# Altium PCB LED Project PCB.PcbDoc
Units mm, origin at the board's own origin, x right, y up, seen from the top; angles counter-clockwise.
Board outline 20 x 20 mm, 2 copper layers (Top Layer, Bottom Layer), stack 1.671 mm thick; 5 components, 4 nets, 10 pads, 1 vias.
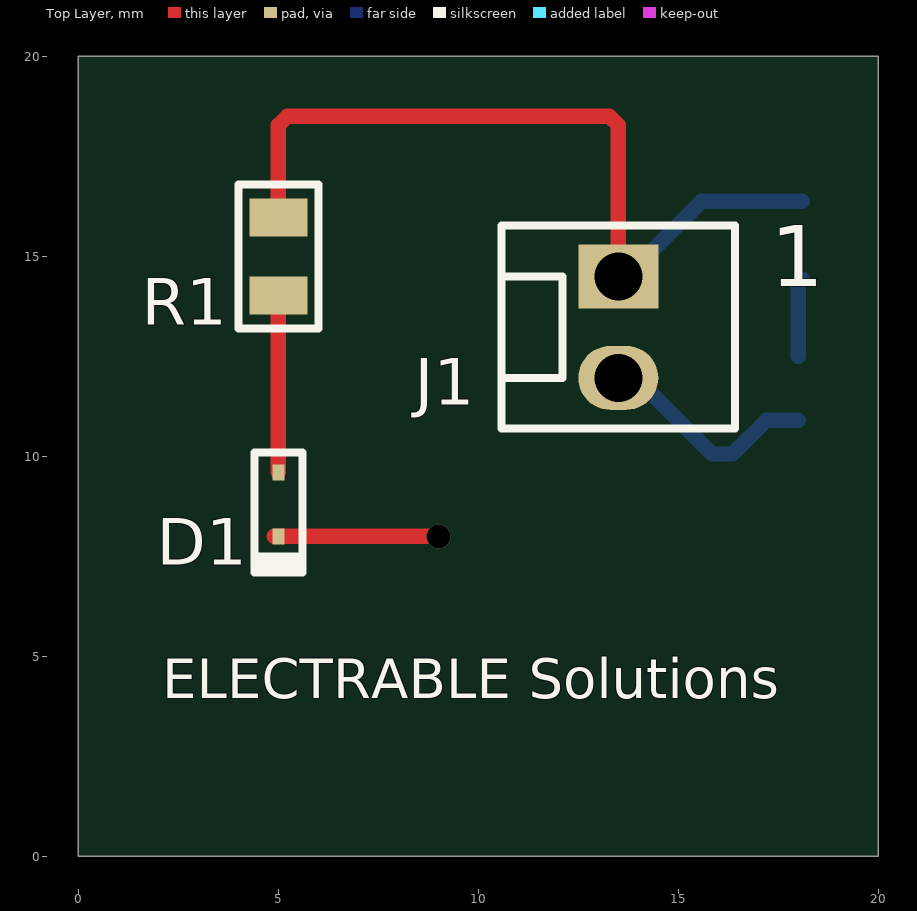
[diagram p0: Top Layer view]
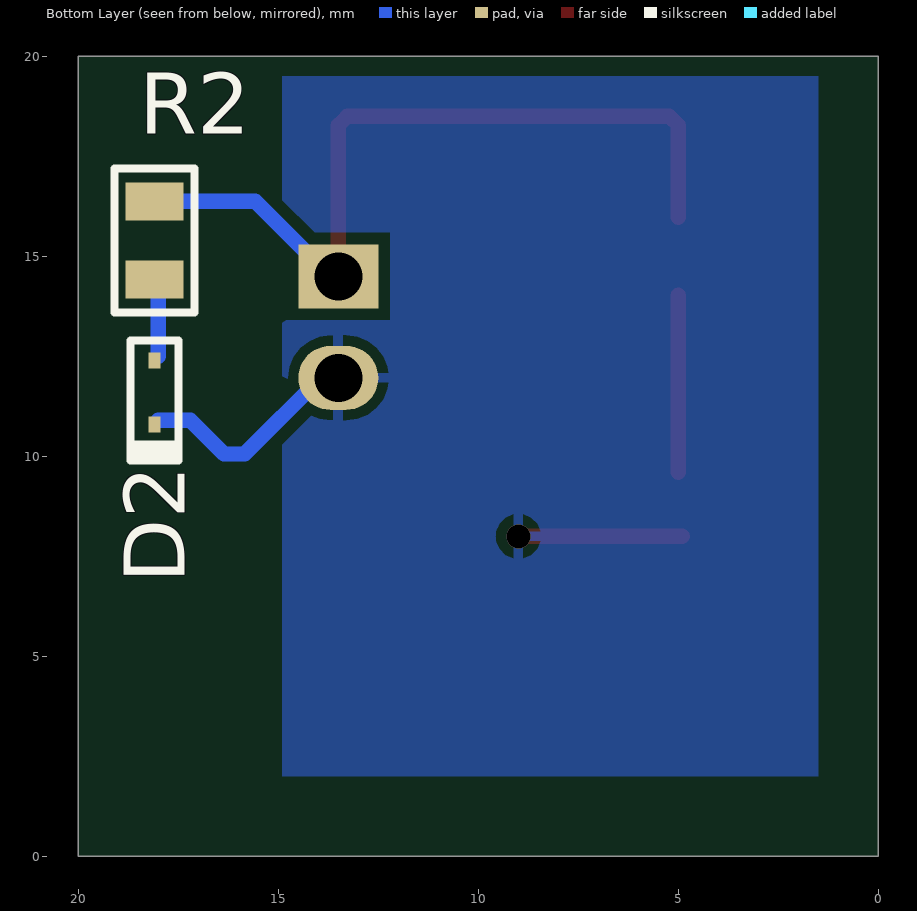
[diagram p1: Bottom Layer view, seen from below]
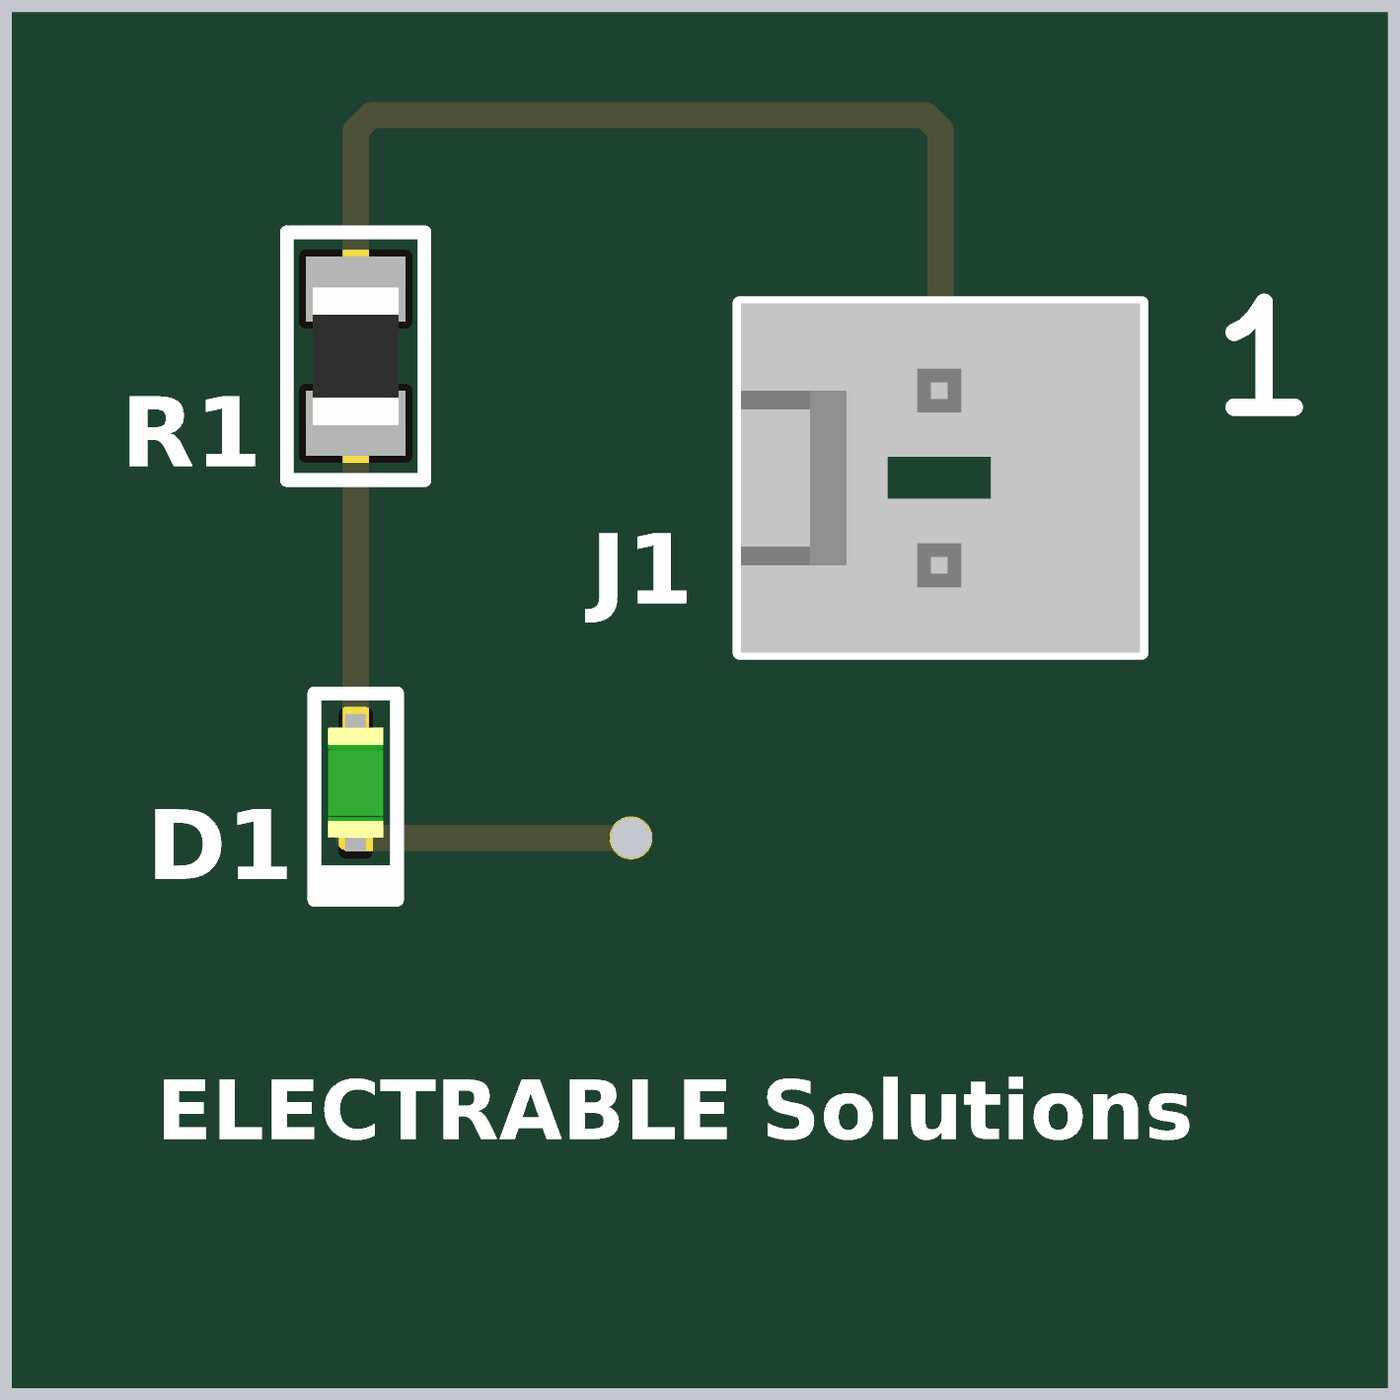
[diagram p2: 3D render of the assembled board from above, using the file's embedded part models]

## Layer stack, top to bottom
Top Solder: solder mask 0.0102, Solder Resist, Dk 3.5
Top Layer: signal copper 0.0356
Dielectric 1: dielectric 1.6, FR-4, Dk 4.8
Bottom Layer: signal copper 0.0356
Bottom Solder: solder mask 0.0102, Solder Resist, Dk 3.5

## Board outline
0,0 20,0 20,20 0,20

## Design rules (kind name [scope] priority, off if disabled: settings)
Clearance [All] p1: gap=0.3 ignorepadtopadclearanceinfootprint=FALSE
PolygonConnect [All] p1: connectstyle=Relief reliefconductorwidth=0.254 reliefentries=4 polygonreliefangle="90 Angle" airgapwidth=0.254
RoutingVias [All] p1: holewidth=0.3 width=0.6 viastyle="Through Hole" minholewidth=0.3 minwidth=0.6 maxholewidth=0.3 maxwidth=0.6
SilkToSolderMaskClearance [IsPad] p1: minsilkscreentomaskgap=0.1 clearancetoexposedcopper=TRUE
SolderMaskExpansion [All] p1: expansion=0.102 istentingtop=FALSE
Width [All] p1: maxlimit=1 minlimit=0.3 preferedwidth=0.5
29 further rules are at their usual default settings.

## Components (designator, comment, footprint, x,y, rotation, side; value= is the part's Value field where it differs from the comment)
D1 "Green" LED1540G 5,8.8 r90 top
D2 "Green" LED1540G 18.1,11.6 r90 bottom
J1 "1x2 Header" HDR1X2 13.5,14.5 r0 top
R1 "360R" R0805 5,15 r90 top
R2 "360R" R0805 18.1,15.4 r90 bottom

## Footprints (in the part's own frame and the unit in brackets; to place one, negate y for a bottom-side part, rotate by r counter-clockwise, add the part's x,y. Pads: shape width x height; smd on the part's side, far side on the other; paste and mask are expansions set on the pad)
HDR1X2 [mm]
  rect 2x1.6 hole 1.2: 1(0,0)
  oval 2x1.6 hole 1.2: 2(0,-2.54)
  silkscreen extent -2.92,-3.81 2.92,1.27, body extent -2.9,-3.81 2.9,1.27, height 11.71
LED1540G [mm]
  rect 0.4x0.3 smd: 1(-0.8,0) 2(0.8,0)
  silkscreen extent -1.7,-0.6 1.3,0.6, body extent -0.8,-0.4 0.8,0.4, height 0.4
R0805 [mm]
  rect 0.95x1.45 smd: 1(-0.975,0) 2(0.975,0)
  silkscreen extent -1.8,-1 1.8,1, body extent -1,-0.62 1,0.62, height 0.61

## Part data
D1 D2: library part LNJ115W8ARA, "Led Green/orange TSS-2 Type SMD", Case Code (Imperial)=0605, Case Code (Metric)=1613, Color=Green,Orange,Yellow, Forward Voltage=1.93V, Manufacturer=Panasonic, Max Operating Temperature=85°C, Min Operating Temperature=-30°C, Package Quantity=1, Supplier Part Number 1=P11142CT-ND, Test Current=10mA, Case/Package=0605, Category=LEDs, Category1=Optoelectronics, ComponentLink1Description=https://datasheet.ciiva.com/1246/340491-1246153.pdf?src-supplier=Element14, ComponentLink1URL=https://datasheet.ciiva.com/1246/340491-1246153.pdf?src-supplier=Element14, ComponentLink2Description=https://datasheet.ciiva.com/1249/340491-1249195.pdf?src-supplier=Farnell, ComponentLink2URL=https://datasheet.ciiva.com/1249/340491-1249195.pdf?src-supplier=Farnell, Dominant Wavelength=630nm, Height=0.55mm, Lead Free="Lead Free", Length=1.6mm, Lens Style=Rectangular, Luminous Intensity=1mcd, Manufacturer Part Number=LNJ115W8ARA, Mount="Surface Mount", Number of Pins=4, Packaging="Cut Tape", Pricing 1="1=0.48, 10=0.316, 100=0.2264, 500=0.18998, 1000=0.17847 (USD)", Reach SVHC Compliant=Yes, RoHS=Yes, RoHS Compliant=Yes, Stock 1=23540, Supplier 1=Digikey, Wavelength=630nm, Width=1.25mm
J1: library part 0022292021, "KK 254 Wire-to-Board Header, Vertical, with Friction Lock, 2 Circuits, Gold (Au) Plating", Manufacturer=Molex, Supplier Part Number 1=538-22-29-2021, Category=Connectors, ComponentLink1Description=https://datasheet.octopart.com/22-29-2021-Molex-datasheet-33002381.pdf?src-supplier=Newark, ComponentLink1URL=https://datasheet.octopart.com/22-29-2021-Molex-datasheet-33002381.pdf?src-supplier=Newark, ComponentLink2Description=https://datasheet.octopart.com/22-29-2021-Molex-datasheet-7277451.pdf?src-supplier=Jameco, ComponentLink2URL=https://datasheet.octopart.com/22-29-2021-Molex-datasheet-7277451.pdf?src-supplier=Jameco, ComponentLink3Description=https://datasheet.octopart.com/22-29-2021-Molex-datasheet-17586671.pdf?src-supplier=TME, ComponentLink3URL=https://datasheet.octopart.com/22-29-2021-Molex-datasheet-17586671.pdf?src-supplier=TME, Manufacturer Part Number=0022292021, Pricing 1="1=0.45, 10=0.375, 50=0.375, 100=0.309, 1000=0.262, 10000=0.214 (USD)", RoHS=No, Stock 1=18345, Supplier 1=Mouser
R1 R2: library part CRCW0805360RFKEA, "SMD Chip Resistor, 360 Ohm, ± 1%, 125 mW, 0805 [2012 Metric], Thick Film, General Purpose", Manufacturer=Vishay, Supplier Part Number 1=71-CRCW0805360RFKEA, Category=Resistors, ComponentLink1Description=https://datasheet.ciiva.com/2467/dcrcwe3-2467773.pdf?src-supplier=Digikey, ComponentLink1URL=https://datasheet.ciiva.com/2467/dcrcwe3-2467773.pdf?src-supplier=Digikey, Manufacturer Part Number=CRCW0805360RFKEA, Pricing 1="1=0.1, 10=0.033, 50=0.033, 100=0.015, 1000=0.011, 10000=0.007 (USD)", Reach SVHC Compliant=4187SVHC, RoHS=Yes, Stock 1=13295, Supplier 1=Mouser

## Via types
v1: diameter 0.6, hole 0.6, Top Layer to Bottom Layer, tented both sides, 1 vias

## Nets (pads, with @x,y where several pads share a name; then routed paths per layer and width w, separated by ;. In a path a pad name is that pad's centre, name@x,y a point inside that pad or via, vN(x,y) a via of type N, cw(c..) or ccw(c..) an arc to the next point about the centre after c; other vN are vias at no path point)
+3V3: J1.1 R1.2 R2.2 | length 20.1
  Top Layer w0.381: R1.2 5,18.277 5.223,18.5 13.277,18.5 13.5,18.277 J1.1
  Bottom Layer w0.381: J1.1 13.7,14.5 15.575,16.375 R2.2
DIODE1: D1.2 R1.1 | length 4.4
  Top Layer w0.381: D1.2 R1.1
DIODE2: D2.2 R2.1 | length 2
  Bottom Layer w0.381: D2.2@18,12.5 18,14.325 R2.1
GND: D1.1 D2.1 J1.2 | length 10.3
  Top Layer w0.381: D1.1@4.9,8 v1(9,8)
  Bottom Layer w0.381: v1(9,8) v1@9.059,8 ; J1.2@13.019,11.96 J1.2 13.94,11.96 15.842,10.058 16.355,10.058 17.197,10.9 D2.1@18,10.9

## Polygon pours and split planes (outlines as drawn)
GND on Bottom Layer "GND_L02_P000" (solid, pour order 0): 1.5,2 14.9,2 14.9,19.5 1.5,19.5

## Silkscreen, mask and mechanical layers (free items; w line width, h text height)
Top Overlay:
  text "ELECTRABLE Solutions" at 2.1,3.623 h1.7

## Text inside footprints (layer, text, board x,y; h text height)
J1: Top Overlay "1" at 17.31,14.246 h1.52